# Altium PCB peregrine3.PcbDoc
Units mil, origin at the board's own origin, x right, y up, seen from the top; angles counter-clockwise.
Board outline 2200 x 2200 mil, 2 copper layers (1#Top, 16#Bottom); 70 components, 94 nets, 341 pads, 36 vias.
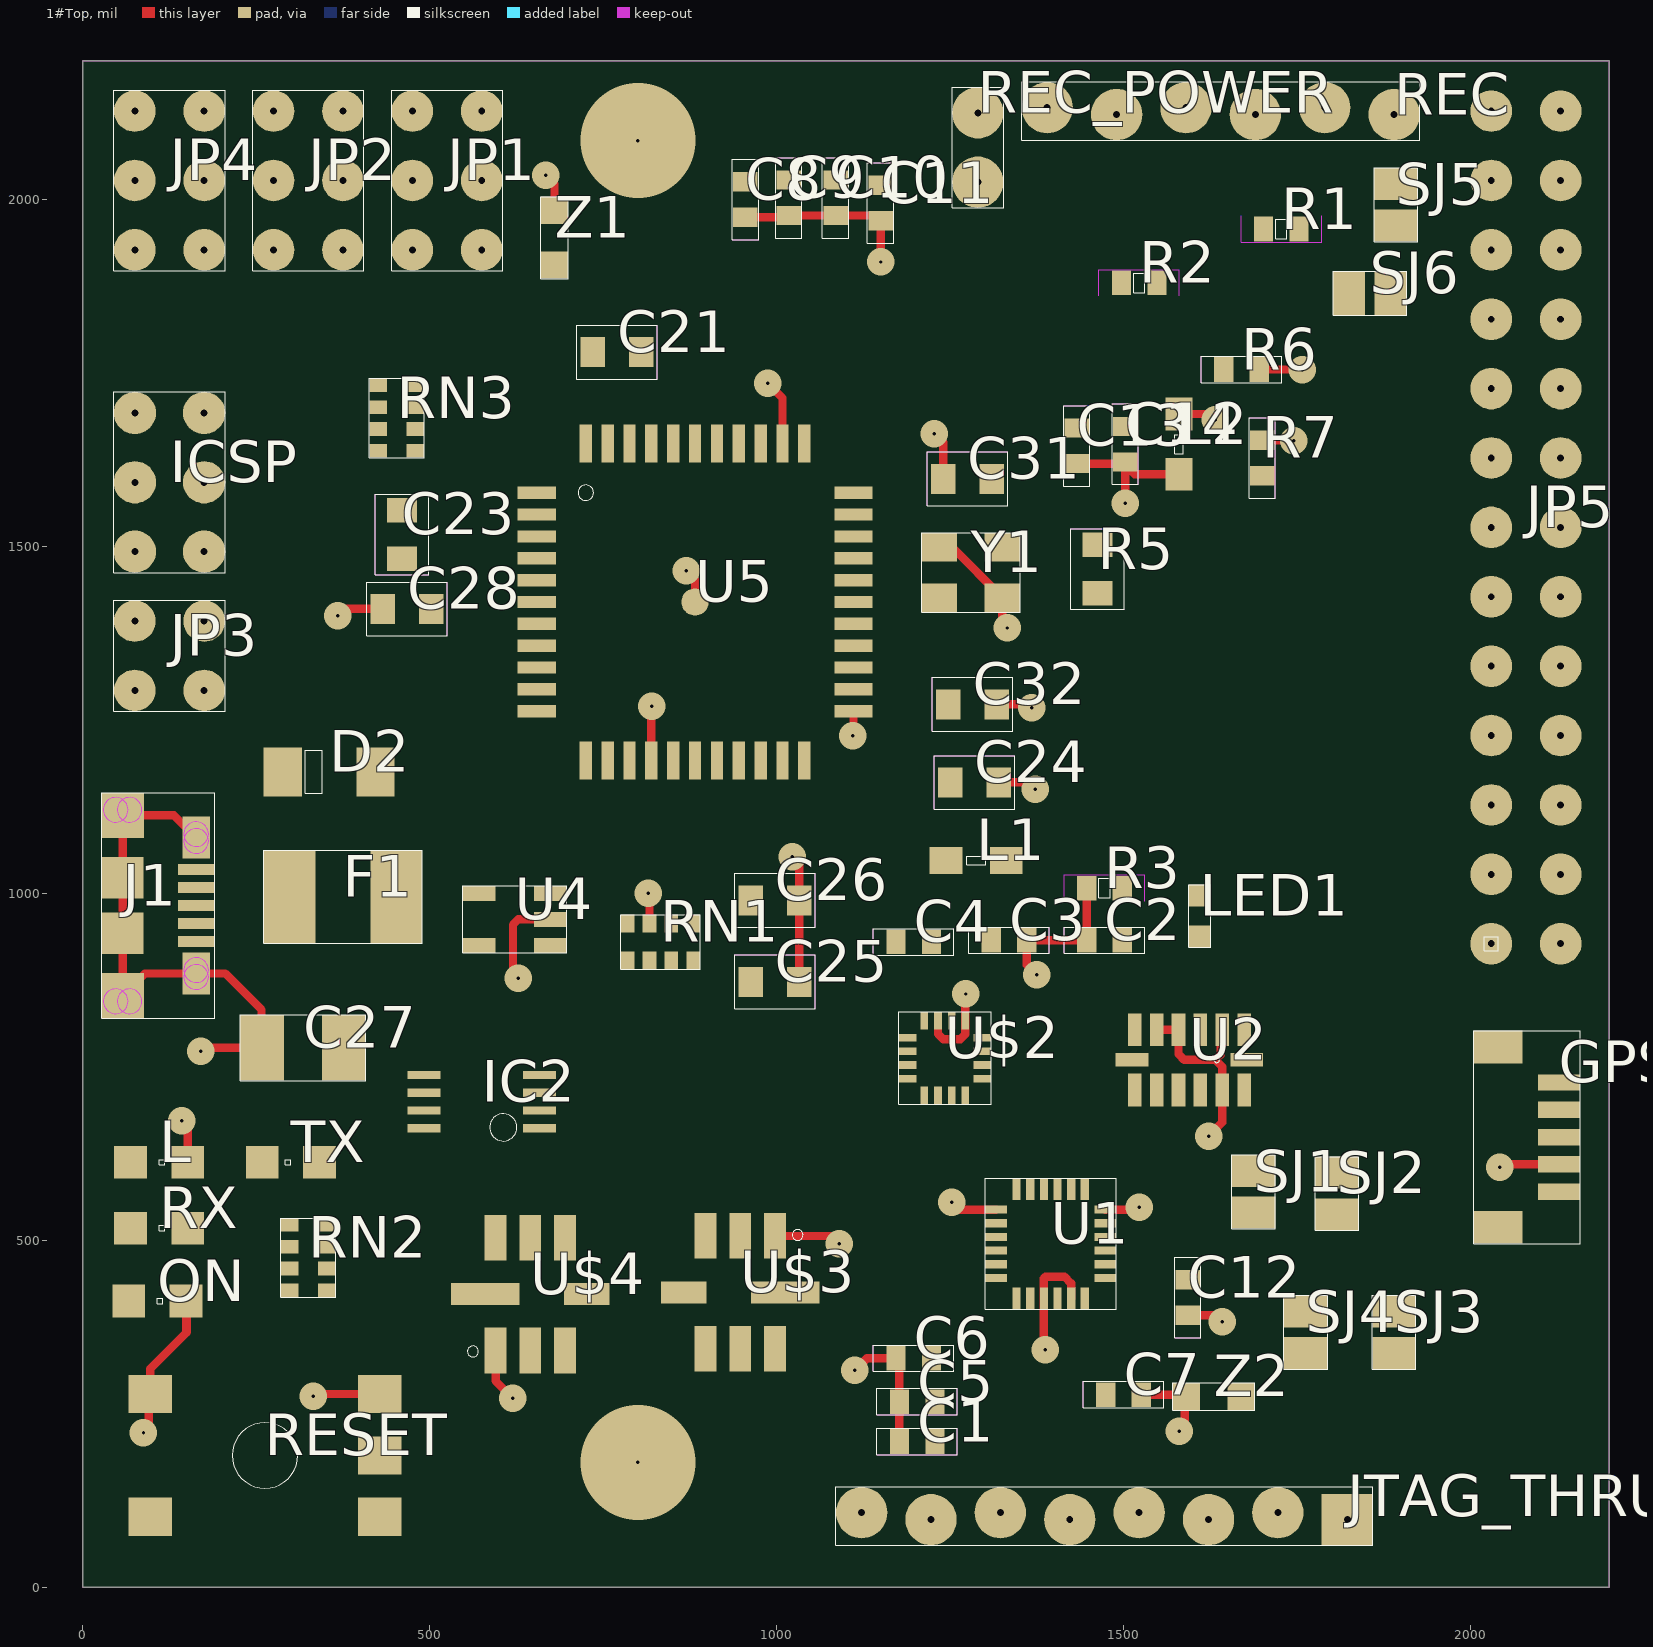
[diagram p0: 1#Top view]
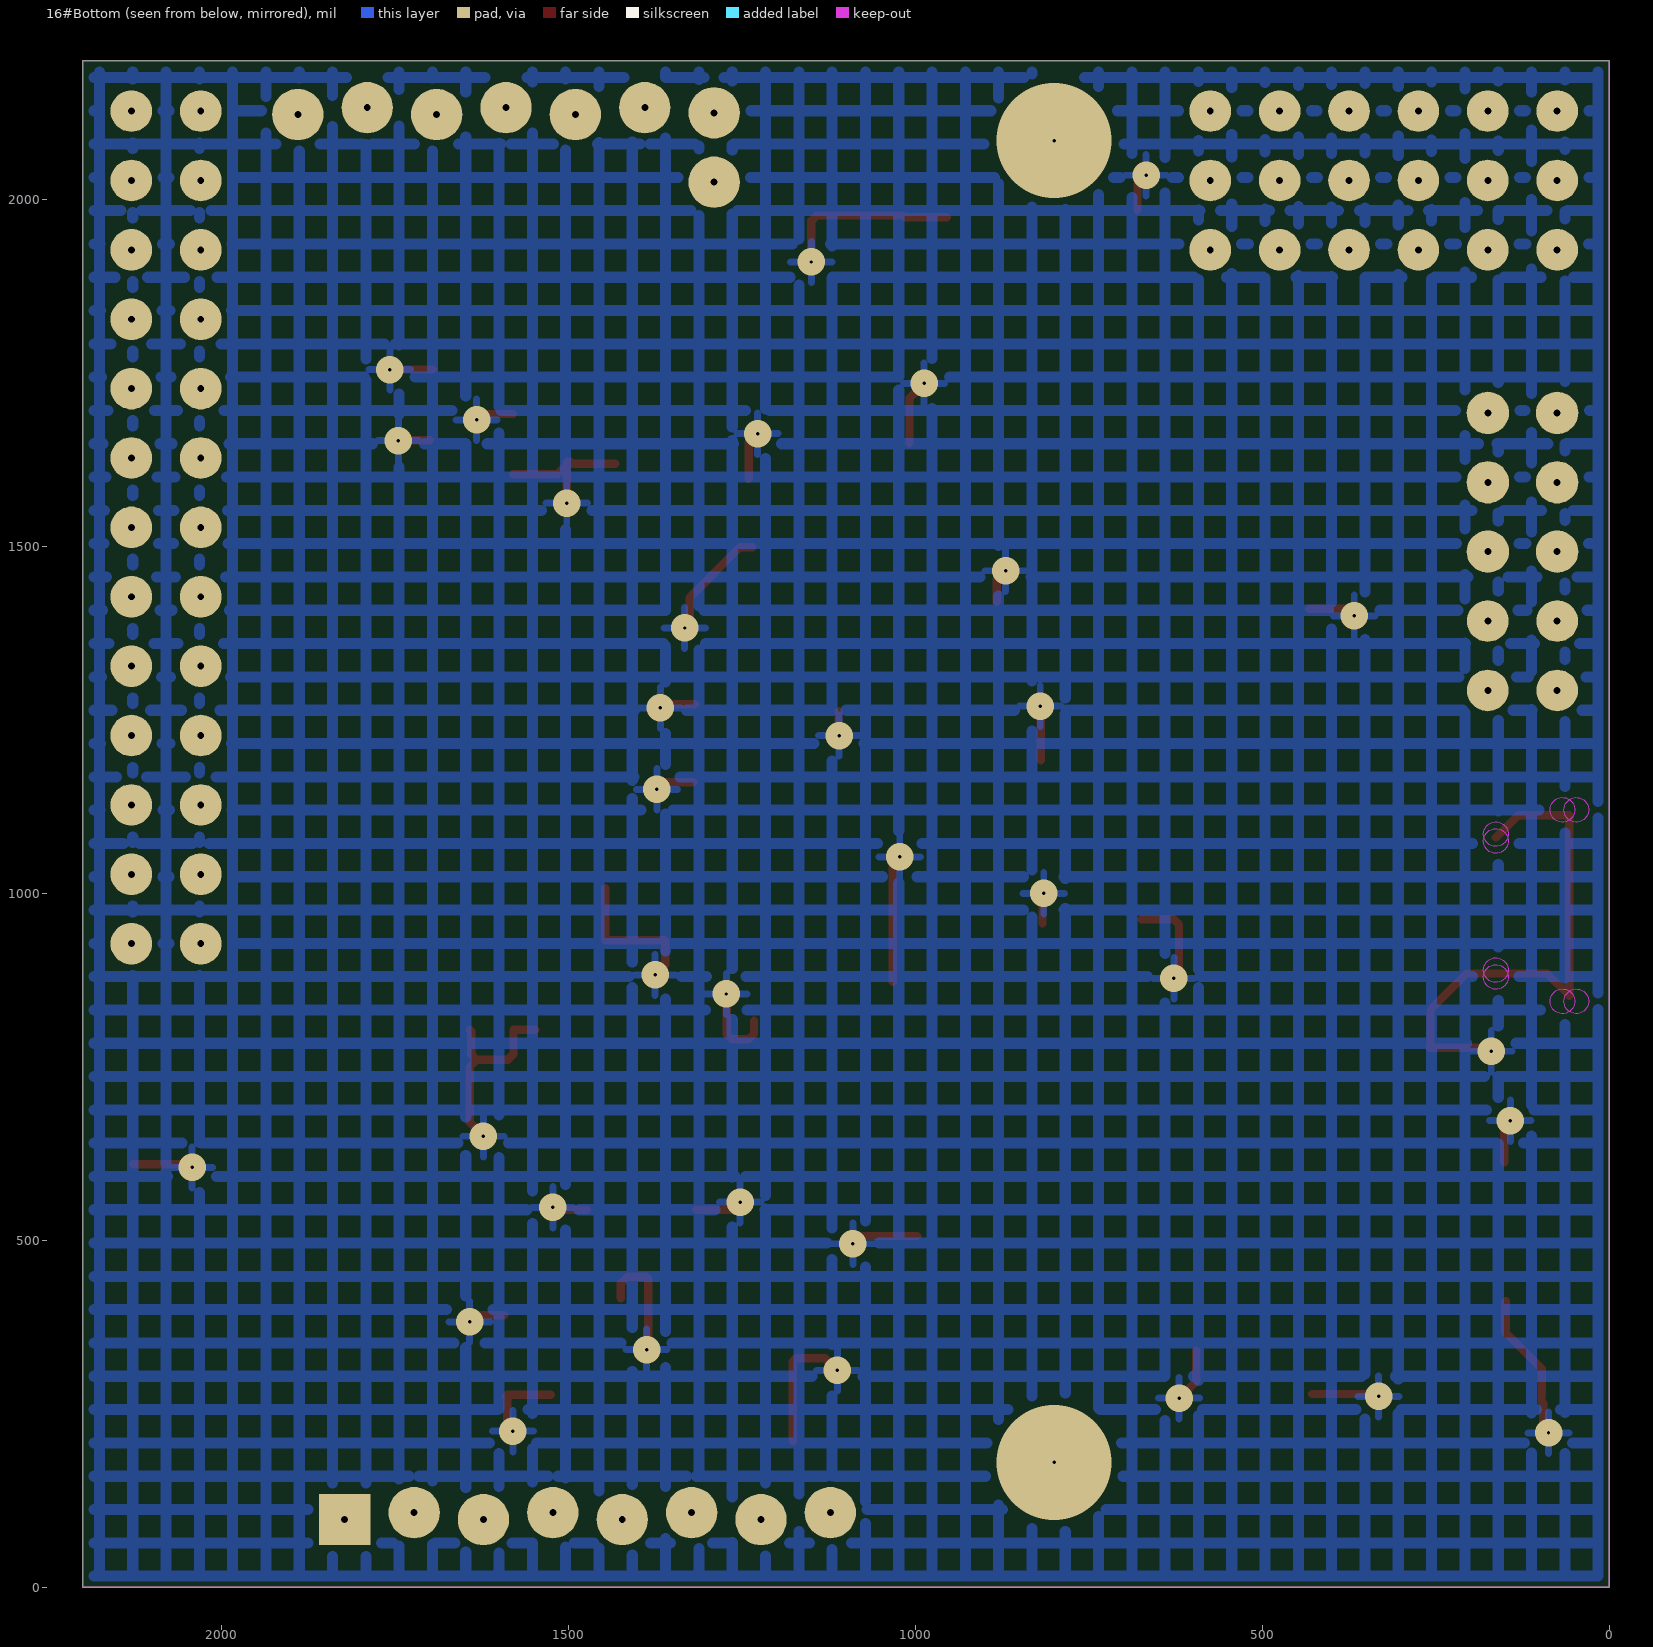
[diagram p1: 16#Bottom view, seen from below]

## Layer stack, top to bottom
1#Top: signal copper 1.4
Dielectric: dielectric 12.6, FR-4, Dk 4.8
16#Bottom: signal copper 1.4

## Board outline
0,0 2200,0 2200,2200 0,2200

## Design rules (kind name [scope] priority, off if disabled: settings)
Clearance "Clearance aref" [InNetClass('aref') vs InNetClass('aref')] p1: gap=10
Clearance "Clearance usbvcc" [InNetClass('usbvcc') vs InNetClass('usbvcc')] p2: gap=10
Clearance "Clearance gnd" [InNetClass('gnd') vs InNetClass('gnd')] p3: gap=10
Clearance "Clearance power" [InNetClass('power') vs InNetClass('power')] p4: gap=10
Clearance "Clearance default" [InNetClass('default') vs InNetClass('default')] p5: gap=10
Clearance "Clearance PCB" [All] p6: gap=8
PolygonConnect [All] p1: connectstyle=Relief reliefconductorwidth=10 reliefentries=4 polygonreliefangle="90 Angle" airgapwidth=10
RoutingLayers "Routing Layers From Layer Stack" [All] p1: top layer_v5=TRUE bottom layer_v5=TRUE
RoutingVias "PCB Via style Round6$0.125984" [All] p1: holewidth=82.99 width=165.98 viastyle="Through Hole" minholewidth=82.99 minwidth=165.98 maxholewidth=82.99 maxwidth=165.98
RoutingVias "PCB Via style Round5$0.023622" [All] p2: holewidth=19.81 width=39.62 viastyle="Through Hole" minholewidth=19.81 minwidth=39.62 maxholewidth=19.81 maxwidth=39.62
RoutingVias "PCB Via style Round1$0.024000" [All] p3: holewidth=20 width=40 viastyle="Through Hole" minholewidth=20 minwidth=40 maxholewidth=20 maxwidth=40
SilkscreenOverComponentPads [All] p1: minsilkscreentomaskgap=10
SolderMaskExpansion [All] p1: expansion=4
Width "Width aref" [InNetClass('aref')] p1: maxlimit=12 minlimit=8 preferedwidth=10
Width "Width usbvcc" [InNetClass('usbvcc')] p2: maxlimit=12 minlimit=8 preferedwidth=10
Width "Width gnd" [InNetClass('gnd')] p3: maxlimit=12 minlimit=8 preferedwidth=10
Width "Width power" [InNetClass('power')] p4: maxlimit=12 minlimit=8 preferedwidth=10
Width "Width default" [InNetClass('default')] p5: maxlimit=12 minlimit=8 preferedwidth=10
Width "Width PCB" [All] p6: maxlimit=12 minlimit=8 preferedwidth=10
26 further rules are at their usual default settings.

## Classes and differential pairs
net class usbvcc: XUSB
net class gnd: UGND
net class default: 3.3V 3V3 5-GND +5V A0 A1 A2 A3 A4 A5 AGND AREF AVCC D0/RX D1/TX D4 D5* D6* D7 D+ D- GND GPIO0(SDA) GPIO1(SCL) GPIO4(GPCLK0) GPIO9(MISO) GPIO10(MOSI) GPIO14(TXD) GPIO15(RXD) GPIO17 GPIO21(PCM_DOUT) GPIO22 GPRIO11(SCKL) GPS-RX GPS-TX HWB IO8 IO9* IO10* IO11* IO12 IO13* LL M_1 M_2 M_3 M_4 M_AUX1 M_AUX2 MISO MOSI N$1 N$2 N$3 N$4 N$5 N$6 N$7 N$8 N$9 N$10 N$11 N$12 N$13 N$14 N$15 N$16 PI_3V3_1 PI_3V3_2 PI_GND1 PI_GND2 RD+ RD- REC1 REC2 REC3 REC4 REC5 REC6 RESET RXLED SCK SCL SDA TXLED UCAP USBID V+ V- VUSB XTAL1 XTAL2

## Components (designator, comment, footprint, x,y, rotation, side; value= is the part's Value field where it differs from the comment)
C1 "Comment" 0402-CAP$SparkFun 1202.5,210 r180 top
C2 "Comment" 0402-CAP$SparkFun 1472.5,932.5 r180 top
C3 "Comment" 0402-CAP$SparkFun 1335,932.5 r0 top
C4 "Comment" 0402-CAP$SparkFun 1197.5,930 r180 top
C5 "Comment" 0402-CAP$SparkFun 1202.5,267.5 r180 top
C6 "Comment" 0402-CAP$SparkFun 1197.5,330 r180 top
C7 "Comment" 0402-CAP$SparkFun 1500,277.5 r0 top
C8 "Comment" 0402-CAP$SparkFun 955,2000 r270 top
C9 "Comment" 0402-CAP$SparkFun 1017.5,2002.5 r270 top
C10 "Comment" 0402-CAP$SparkFun 1085,2002.5 r270 top
C11 "Comment" 0402-CAP$SparkFun 1150,1995 r270 top
C12 "Comment" 0402-CAP$SparkFun 1592.5,417.5 r270 top
C13 "Comment" 0402-CAP$SparkFun 1432.5,1645 r270 top
C14 "Comment" 0402-CAP$SparkFun 1502.5,1647.5 r270 top
C21 "Comment" C0603-ROUND$SmartPrj 770,1780 r0 top
C23 "Comment" C0603-ROUND$SmartPrj 460,1517.5 r90 top
C24 "Comment" C0603-ROUND$SmartPrj 1285,1160 r0 top
C25 "Comment" C0603-ROUND$SmartPrj 997.5,872.5 r0 top
C26 "Comment" C0603-ROUND$SmartPrj 997.5,990 r0 top
C27 "Comment" SMC_B$rcl 317.5,777.5 r180 top
C28 "Comment" C0603-ROUND$SmartPrj 467.5,1410 r0 top
C31 "Comment" C0603-ROUND$SmartPrj 1275,1597.5 r0 top
C32 "Comment" C0603-ROUND$SmartPrj 1282.5,1272.5 r0 top
D2 "Comment" MINIMELF$diode 355,1175 r0 top
F1 "Comment" L1812$rcl 375,995 r180 top
GPS "Comment" EM408_CON$SparkFun 2127.5,727.5 r270 top
IC2 "Comment" MSOP08$linear 575,700 r90 top
ICSP "Comment" 2X03$SmartPrj 125,1592.5 r270 top
J1 "Comment" CON2_USB_MICRO_B_AT$SmartPrj 57.5,982.5 r270 top
JP1 "Comment" 2X03$pinhead 525,2027.5 r90 top
JP2 "Comment" 2X03$pinhead 325,2027.5 r90 top
JP3 "Comment" 2X02$pinhead 125,1342.5 r90 top
JP4 "Comment" 2X03$pinhead 125,2027.5 r90 top
JP5 "Comment" 2X13$pinhead 2080,1527.5 r270 top
JTAG_THRU "Comment" 1X08_LOCK$SparkFun 1822.5,102.5 r180 top
L "Comment" CHIPLED_0805$led 110,612.5 r270 top
L1 "Comment" 0805$wuerth-elektronik 1287.5,1047.5 r0 top
L2 "Comment" 0805$wuerth-elektronik 1580,1647.5 r90 top
LED1 "Comment" LED-0603$SparkFun 1610,967.5 r0 top
ON "Comment" CHIPLED_0805$led 107.5,412.5 r270 top
R1 "Comment" 0402-RES$SparkFun 1727.5,1957.5 r180 top
R2 "Comment" 0402-RES$SparkFun 1522.5,1880 r0 top
R3 "Comment" 0402-RES$SparkFun 1472.5,1007.5 r0 top
R5 "Comment" R0603-ROUND$SmartPrj 1462.5,1467.5 r90 top
R6 "Comment" R0402$SmartPrj 1670,1755 r0 top
R7 "Comment" R0402$SmartPrj 1700,1627.5 r270 top
REC "Comment" 1X06_LOCK$SparkFun 1890,2122.5 r180 top
REC_POWER "Comment" 1X02$SparkFun 1290,2125 r270 top
RESET "Comment" TS42$SmartPrj 262.5,190 r180 top
RN1 "Comment" CAY16$resistor-dil 832.5,930 r180 top
RN2 "Comment" CAY16$resistor-dil 325,475 r90 top
RN3 "Comment" CAY16$resistor-dil 452.5,1685 r90 top
RX "Comment" CHIPLED_0805$led 110,517.5 r270 top
SJ1 "Comment" SJ$jumper 1687.5,570 r270 top
SJ2 "Comment" SJ$jumper 1807.5,567.5 r270 top
SJ3 "Comment" SJ$jumper 1890,367.5 r90 top
SJ4 "Comment" SJ$jumper 1762.5,367.5 r90 top
SJ5 "Comment" SJ$jumper 1892.5,1992.5 r270 top
SJ6 "Comment" SJ$jumper 1855,1865 r180 top
TX "Comment" CHIPLED_0805$led 300,612.5 r90 top
U1 "Comment" QFN-24$SparkFun 1395,495 r0 top
U2 "Comment" LGA14$SparkFun 1595,760 r0 top
U4 "Comment" SOT23-5$SparkFun 622.5,962.5 r90 top
U5 "Comment" TQFP44-PAD$SmartPrj 882.5,1420 r0 top
U$2 "Comment" 16LPCC$SparkFun 1242.5,762.5 r90 top
U$3 "Comment" BMP085$SparkFun 947.5,425 r270 top
U$4 "Comment" BMP085$SparkFun 645,422.5 r90 top
Y1 "Comment" CRYSTAL-3.2-2.5$SmartPrj 1280,1462.5 r0 top
Z1 "Comment" CT/CN0603$varistor 680,1945 r90 top
Z2 "Comment" CT/CN0603$varistor 1630,275 r180 top

## Footprints (in the part's own frame and the unit in brackets; to place one, negate y for a bottom-side part, rotate by r counter-clockwise, add the part's x,y. Pads: shape width x height; smd on the part's side, far side on the other; paste and mask are expansions set on the pad)
1X02$SparkFun [mil]
  round 74 hole 10: 1(0,0) 2(100,0)
  silkscreen extent -37,-37 137,37
1X06_LOCK$SparkFun [mil]
  round 74 hole 10: 1(0,0) 2(100,-10) 3(200,0) 4(300,-10) 5(400,0) 6(500,-10)
  silkscreen extent -37,-47 537,37
1X08_LOCK$SparkFun [mil]
  rect 74x74 hole 10: 1(0,5)
  round 74 hole 10: 2(100,-5) 3(200,5) 4(300,-5) 5(400,5) 6(500,-5) 7(600,5) 8(700,-5)
  silkscreen extent -37,-42 737,42
2X02$pinhead [mil]
  round 60 / inner round 0 / far side round 60 hole 10: 1(-50,-50) 2(-50,50) 3(50,-50) 4(50,50)
  silkscreen extent -80,-80 80,80
2X03$pinhead [mil]
  round 60 / inner round 0 / far side round 60 hole 10: 1(-100,-50) 2(-100,50) 3(0,-50) 4(0,50) 5(100,-50) 6(100,50)
  silkscreen extent -130,-80 130,80
2X03$SmartPrj [mm]
  round 1.55 / inner round 0 / far side round 1.55 hole 0.254: 1(-2.54,-1.27) 2(-2.54,1.27) 3(0,-1.27) 4(0,1.27) 5(2.54,-1.27) 6(2.54,1.27)
  silkscreen extent -3.32,-2.05 3.32,2.05
2X13$pinhead [mil]
  round 60 / inner round 0 / far side round 60 hole 10: 1(-600,-50) 2(-600,50) 3(-500,-50) 4(-500,50) 5(-400,-50) 6(-400,50) 7(-300,-50) 8(-300,50) 9(-200,-50) 10(-200,50) 11(-100,-50) 12(-100,50) 13(0,-50) 14(0,50) 15(100,-50) 16(100,50) 17(200,-50) 18(200,50) 19(300,-50) 20(300,50) 21(400,-50) 22(400,50) 23(500,-50) 24(500,50) 25(600,-50) 26(600,50)
  silkscreen extent 590,-60 610,-40
16LPCC$SparkFun [mm]
  rect 0.65x0.28 smd: 1(-1.37,0.75) 2(-1.37,0.25) 3(-1.37,-0.25) 4(-1.37,-0.75) 9(1.37,-0.75) 10(1.37,-0.25) 11(1.37,0.25) 12(1.37,0.75)
  rect 0.28x0.65 smd: 5(-0.75,-1.37) 6(-0.25,-1.37) 7(0.25,-1.37) 8(0.75,-1.37) 13(0.75,1.37) 14(0.25,1.37) 15(-0.25,1.37) 16(-0.75,1.37)
  silkscreen extent -1.69,-1.69 1.69,1.69
0402-CAP$SparkFun [mm]
  rect 0.7x0.9 smd: 1(-0.65,0) 2(0.65,0)
  1#Top keep-out lines w0: 1.473,-0.483 1.473,0.483 -1.473,0.483 -1.473,-0.483
  silkscreen extent -1.47,-0.48 1.47,0.48
0402-RES$SparkFun [mm]
  rect 0.7x0.9 smd: 1(-0.65,0) 2(0.65,0)
  1#Top keep-out lines w0: 1.473,-0.483 1.473,0.483 -1.473,0.483 -1.473,-0.483
  silkscreen extent -0.2,-0.36 0.2,0.36
0805$wuerth-elektronik [mm]
  rect 1.2x1 smd: 1(-1.1,0) 2(1.1,0)
  silkscreen extent -0.35,-0.15 0.35,0.15
BMP085$SparkFun [mm]
  rect 1.67x0.8 smd: 1(-2.065,1.27) 2(-2.065,0) 3(-2.065,-1.27) 5(2.065,-1.27) 6(2.065,0) 7(2.065,1.27)
  rect 0.8x1.67 smd: 4(0,-2.065)
  rect 0.8x2.5 smd: 8(0,1.65)
  silkscreen extent -2.3,1.9 -1.9,2.3
C0603-ROUND$SmartPrj [mil]
  rect 35.37x43.31 smd: 1(-35,0) 2(35,0)
  1#Top keep-out lines w0: -57.99,-38.7 -57.99,38.7 57.99,38.7 57.99,-38.7
  silkscreen extent -58,-39 58,39
CAY16$resistor-dil [mm]
  rect 0.5x0.65 smd: 1(-1.2,-0.675) 2(-0.4,-0.675) 3(0.4,-0.675) 4(1.2,-0.675) 5(1.2,0.675) 6(0.4,0.675) 7(-0.4,0.675) 8(-1.2,0.675)
  silkscreen extent -1.45,-1 1.45,1
CHIPLED_0805$led [mm]
  rect 1.2x1.2 smd: A(0,-1.05) C(0,1.05)
  silkscreen extent -0.1,0 0.1,0.2
CON2_USB_MICRO_B_AT$SmartPrj [mil]
  rect 16x53 smd: P1(-52,106) P2(-26,106) P3(0,106) P4(26,106) P5(52,106)
  rect 65x61 smd: S1(-130,0) S2(130,0)
  rect 60x40 smd: S3(-98,106) S4(98,106)
  rect 60x60 smd: S5(-40,0) S6(40,0)
  Keep-Out Layer circle w0: c103,106 r17.78
  Keep-Out Layer circle w0: c93,106 r17.78
  Keep-Out Layer circle w0: c-93,106 r17.78
  Keep-Out Layer circle w0: c-103,106 r17.78
  Keep-Out Layer circle w0: c138,-10 r17.78
  Keep-Out Layer circle w0: c138,10 r17.78
  Keep-Out Layer circle w0: c-138,-10 r17.78
  Keep-Out Layer circle w0: c-138,10 r17.78
  silkscreen extent -163,-31 162,133
CRYSTAL-3.2-2.5$SmartPrj [mm]
  rect 1.3x1.05 smd: 1(-1.15,-0.925) 2(1.15,-0.925) 3(1.15,0.925) 4(-1.15,0.925)
  silkscreen extent -1.8,-1.45 1.8,1.45
CT/CN0603$varistor [mm]
  rect 1x1 smd: 1(-1,0) 2(1,0)
  silkscreen extent -1.5,-0.5 1.5,0.5
EM408_CON$SparkFun [mm]
  rect 0.6x1.55 smd: 1(4,0) 2(3,0) 3(2,0) 4(1,0) 5(0,0)
  rect 1.2x1.8 smd: P$1(-1.3,-2.225) P$2(5.3,-2.225)
  silkscreen extent -1.9,-3.12 5.9,0.78
L1812$rcl [mm]
  rect 1.9x3.4 smd: 1(-1.95,0) 2(1.95,0)
  silkscreen extent -2.9,-1.7 2.9,1.7
LED-0603$SparkFun [mm]
  rect 0.8x0.8 smd: A(0,-0.75) C(0,0.75)
  silkscreen extent -0.4,-1.15 0.4,1.15
LGA14$SparkFun [mm]
  rect 0.5x1.2 smd: 1(2,1.1) 2(1.2,1.1) 3(0.4,1.1) 4(-0.4,1.1) 5(-1.2,1.1) 6(-2,1.1) 8(-2,-1.1) 9(-1.2,-1.1) 10(-0.4,-1.1) 11(0.4,-1.1) 12(1.2,-1.1) 13(2,-1.1)
  rect 1.2x0.5 smd: 7(-2.1,0) 14(2.1,0)
  silkscreen extent 0.9,-0.1 1.1,0.1
MINIMELF$diode [mm]
  rect 1.4x1.8 smd: A(1.7,0) C(-1.7,0)
  silkscreen extent -0.86,-0.79 -0.25,0.79
MSOP08$linear [mm]
  rect 0.3x1.2 smd: 1(-0.976,-2.113) 2(-0.326,-2.113) 3(0.324,-2.113) 4(0.974,-2.113) 5(0.974,2.112) 6(0.324,2.112) 7(-0.326,2.112) 8(-0.976,2.112)
  silkscreen extent -1.45,-1.29 -0.45,-0.29
QFN-24$SparkFun [mm]
  rect 0.8x0.3 smd: 1(-2,1.25) 2(-2,0.75) 3(-2,0.25) 4(-2,-0.25) 5(-2,-0.75) 6(-2,-1.25) 13(2,-1.25) 14(2,-0.75) 15(2,-0.25) 16(2,0.25) 17(2,0.75) 18(2,1.25)
  rect 0.3x0.8 smd: 7(-1.25,-2) 8(-0.75,-2) 9(-0.25,-2) 10(0.25,-2) 11(0.75,-2) 12(1.25,-2) 19(1.25,2) 20(0.75,2) 21(0.25,2) 22(-0.25,2) 23(-0.75,2) 24(-1.25,2)
  silkscreen extent -2.4,-2.4 2.4,2.4
R0402$SmartPrj [mm]
  rect 0.7x0.9 smd: 1(-0.65,0) 2(0.65,0)
  1#Top keep-out lines w0: -1.473,-0.483 -1.473,0.483 1.473,0.483 1.473,-0.483
  silkscreen extent -1.47,-0.48 1.47,0.48
R0603-ROUND$SmartPrj [mil]
  rect 35.37x43.31 smd: 1(-35,0) 2(35,0)
  1#Top keep-out lines w0: -57.99,-38.7 -57.99,38.7 57.99,38.7 57.99,-38.7
  silkscreen extent -58,-39 58,39
SJ$jumper [mil]
  rect 46x63 smd: 1(-30,0) 2(30,0)
  silkscreen extent -53,-32 53,32
SMC_B$rcl [mm]
  rect 1.6x2.4 smd: +(-1.5,0) -(1.5,0)
  silkscreen extent -2.3,-1.2 2.3,1.2
SOT23-5$SparkFun [mm]
  rect 0.55x1.2 smd: 1(-0.95,-1.3) 2(0,-1.3) 3(0.95,-1.3) 4(0.95,1.3) 5(-0.95,1.3)
  silkscreen extent -1.23,-1.9 1.23,1.9
TQFP44-PAD$SmartPrj [mm]
  rect 1.4x0.45 smd: 1(-5.8,4) 2(-5.8,3.2) 3(-5.8,2.4) 4(-5.8,1.6) 5(-5.8,0.8) 6(-5.8,0) 7(-5.8,-0.8) 8(-5.8,-1.6) 9(-5.8,-2.4) 10(-5.8,-3.2) 11(-5.8,-4) 23(5.8,-4) 24(5.8,-3.2) 25(5.8,-2.4) 26(5.8,-1.6) 27(5.8,-0.8) 28(5.8,0) 29(5.8,0.8) 30(5.8,1.6) 31(5.8,2.4) 32(5.8,3.2) 33(5.8,4)
  rect 0.45x1.4 smd: 12(-4,-5.8) 13(-3.2,-5.8) 14(-2.4,-5.8) 15(-1.6,-5.8) 16(-0.8,-5.8) 17(0,-5.8) 18(0.8,-5.8) 19(1.6,-5.8) 20(2.4,-5.8) 21(3.2,-5.8) 22(4,-5.8) 34(4,5.8) 35(3.2,5.8) 36(2.4,5.8) 37(1.6,5.8) 38(0.8,5.8) 39(0,5.8) 40(-0.8,5.8) 41(-1.6,5.8) 42(-2.4,5.8) 43(-3.2,5.8) 44(-4,5.8)
  round 1 smd: P$1(0,0)
  silkscreen extent -4.28,3.72 -3.72,4.28
TS42$SmartPrj [mm]
  rect 1.6x1.4 smd: 1(-4.2,2.25) 2(4.2,2.25) 3(-4.2,-2.25) 4(4.2,-2.25) 5(-4.2,0)
  silkscreen extent -1.2,-1.2 1.2,1.2

## Via types
v1: diameter 39.62, hole 5, 1#Top to 16#Bottom, 34 vias
v2: diameter 165.98, hole 5, 1#Top to 16#Bottom, 2 vias

## Nets (pads, with @x,y where several pads share a name; then routed paths per layer and width w, separated by ;. In a path a pad name is that pad's centre, name@x,y a point inside that pad or via, vN(x,y) a via of type N, cw(c..) or ccw(c..) an arc to the next point about the centre after c; other vN are vias at no path point)
3.3V: 
3V3: 
5-GND: 
+5V: 
A0: 
A1: 
A2: 
A3: 
A4: 
A5: 
AGND: 
AREF: 
AVCC: 
D0/RX: 
D1/TX: 
D4: 
D5*: 
D6*: 
D7: 
D+: 
D-: 
GND:  | length 4583.6
  1#Top w12: v1(87.5,222.5) 95,230 95,265 97.5,267.5 97.5,315 ; 97.15,278.58 97.15,314.65 97.5,315 ; v1(142.5,672.5) 151.34,663.66 151.34,612.5 ; 163.5,1080.5 131.5,1112.5 57.5,1112.5 57.5,1022.5 57.5,942.5 57.5,852.5 89.5,884.5 163.5,884.5 205.5,884.5 257.5,832.5 257.5,778.45 258.45,777.5 175,777.5 v1(170,772.5) ; v1(332.5,275) 336.08,278.58 427.85,278.58 ; v1(367.5,1400) 377.5,1410 432.5,1410 ; 595,341.2 595,297.5 v1(620,272.5) ; v1(627.5,877.5) 620,895 620,955 627.5,962.5 673.68,962.5 ; v1(667.5,2035) 680,2022.5 680,1984.37 ; v1(815,1000) 816.75,998.25 816.75,956.57 ; 819.51,1191.65 819.51,1269.51 v1(820,1270) ; v1(870,1465) 882.5,1452.5 882.5,1420 ; 955,1974.41 1015,1974.41 1017.5,1976.91 1085,1976.91 1142.5,1976.91 1150,1969.41 v1(1150,1910) ; v1(987.5,1735) 1008.48,1714.02 1008.48,1648.35 ; 997.5,506.3 1078.7,506.3 v1(1090,495) ; v1(1022.5,1052.5) 1032.5,1042.5 1032.5,990 1032.5,872.5 ; v1(1110,1227.5) 1110.85,1228.35 1110.85,1262.52 ; v1(1112.5,312.5) 1130,330 1171.91,330 1176.91,325 1176.91,267.5 1176.91,210 ; v1(1227.5,1662.5) 1240,1650 1240,1597.5 ; 1232.66,816.44 1232.66,797.34 1240,790 1265,790 1272.03,797.03 1272.03,816.44 1272.03,854.53 v1(1272.5,855) ; 1234.72,1498.92 1252.44,1498.92 1325.28,1426.08 1325.28,1389.72 v1(1332.5,1382.5) ; v1(1252.5,555) 1263.29,544.21 1316.26,544.21 ; 1317.5,1272.5 1362.5,1272.5 v1(1367.5,1267.5) ; 1320,1160 1362.5,1160 v1(1372.5,1150) ; v1(1375,882.5) 1360.59,896.91 1360.59,932.5 1446.91,932.5 1446.91,1007.5 ; 1385.16,416.26 1385,416.42 ; v1(1387.5,342.5) 1385,345 1385,416.42 ; 1424.53,416.26 1424.53,437.97 1415,447.5 1387.5,447.5 1385,445 1385,416.42 ; 1432.5,1619.41 1500,1619.41 1502.5,1621.91 v1(1502.5,1562.5) ; 1473.74,544.21 1519.21,544.21 v1(1522.5,547.5) ; 1525.59,277.5 1588.13,277.5 ; 1547.76,803.31 1579.25,803.31 1579.25,768.25 1587.5,760 1632.5,760 ; v1(1580,225) 1588.13,233.13 1588.13,277.5 ; 1580,1690.81 1616.69,1690.81 v1(1632.5,1682.5) ; 1590.63,275 1588.13,277.5 ; 1592.5,391.91 1633.09,391.91 v1(1642.5,382.5) ; v1(1622.5,650) 1642.24,669.74 1642.24,716.69 1642.24,750.26 1632.5,760 ; 1642.24,803.31 1640,801.06 1640,767.5 1632.5,760 ; 1695.59,1755 v1(1757.5,1755) ; 1700,1653.09 1734.41,1653.09 v1(1745,1652.5) ; v1(2042.5,605) 2046.89,609.39 2127.5,609.39 ; 97.5,315 148.84,366.34 ; 148.84,366.34 148.84,412.5 150,411.34 150,367.5 148.84,366.34
  16#Bottom w12: v1@82.5,215 87.5,220 v1(87.5,222.5) ; v1@140,675 142.5,675 v1(142.5,672.5) ; v1@162.5,767.5 167.5,772.5 v1(170,772.5) ; v1@332.5,272.5 v1(332.5,275) ; v1@365,1397.5 v1(367.5,1400) ; v1(620,272.5) 622.5,272.5 v1@625,270 ; v1@627.5,870 v1(627.5,877.5) ; v1@665,2037.5 v1(667.5,2035) ; v1@812.5,1000 v1(815,1000) ; v1(820,1270) v1@820,1272.5 ; v1@867.5,1467.5 v1(870,1465) ; v1@985,1735 v1(987.5,1735) ; v1(1022.5,1052.5) v1@1022.5,1055 ; v1(1090,495) 1090,492.5 v1@1092.5,490 ; v1@1110,310 v1(1112.5,312.5) ; v1@1110,1225 v1(1110,1227.5) ; v1@1150,1907.5 v1(1150,1910) ; v1@1222.5,1672.5 1227.5,1667.5 v1(1227.5,1662.5) ; v1@1250,555 v1(1252.5,555) ; v1(1272.5,855) v1@1272.5,860 ; v1(1332.5,1382.5) 1335,1382.5 v1@1337.5,1380 ; v1(1367.5,1267.5) v1@1372.5,1267.5 ; v1@1370,1150 v1(1372.5,1150) ; v1(1375,882.5) v1@1377.5,882.5 ; v1@1387.5,337.5 v1(1387.5,342.5) ; v1(1502.5,1562.5) v1@1502.5,1570 ; v1(1522.5,547.5) v1@1522.5,550 ; v1@1577.5,222.5 v1(1580,225) ; v1@1620,650 v1(1622.5,650) ; v1@1627.5,1680 v1(1632.5,1682.5) ; v1(1642.5,382.5) v1@1647.5,377.5 ; v1@1742.5,1647.5 1740,1647.5 v1(1745,1652.5) ; v1@1747.5,1747.5 v1(1757.5,1755) ; v1@2040,602.5 v1(2042.5,605)
GPIO0(SDA): 
GPIO1(SCL): 
GPIO4(GPCLK0): 
GPIO9(MISO): 
GPIO10(MOSI): 
GPIO14(TXD): 
GPIO15(RXD): 
GPIO17: 
GPIO21(PCM_DOUT): 
GPIO22: 
GPRIO11(SCKL): 
GPS-RX: 
GPS-TX: 
HWB: 
IO8: 
IO9*: 
IO10*: 
IO11*: 
IO12: 
IO13*: 
LL: 
M_1: 
M_2: 
M_3: 
M_4: 
M_AUX1: 
M_AUX2: 
MISO: 
MOSI: 
N$1: 
N$2: 
N$3: 
N$4: 
N$5: 
N$6: 
  other v2: 800,180
N$7: 
N$8: 
N$9: 
N$10: 
N$11: 
N$12: 
N$13: 
N$14: 
  other v2: 800,2085
N$15: 
N$16: 
PI_3V3_1: 
PI_3V3_2: 
PI_GND1: 
PI_GND2: 
RD+: 
RD-: 
REC1: 
REC2: 
REC3: 
REC4: 
REC5: 
REC6: 
RESET: 
RXLED: 
SCK: 
SCL: 
SDA: 
TXLED: 
UCAP: 
UGND:  | length 90.1
  1#Top w12: 1497.5,1622.5 1515.81,1604.19 1580,1604.19
USBID: 
V+: 
V-: 
VUSB: 
XTAL1: 
XTAL2: 
XUSB: 
pads on no net: C1.1 C1.2 C2.1 C2.2 C3.1 C3.2 C4.1 C4.2 C5.1 C5.2 C6.1 C6.2 C7.1 C7.2 C8.1 C8.2 C9.1 C9.2 C10.1 C10.2 C11.1 C11.2 C12.1 C12.2 C13.1 C13.2 C14.1 C14.2 C21.1 C21.2 C23.1 C23.2 C24.1 C24.2 C25.1 C25.2 C26.1 C26.2 C27.+ C27.- C28.1 C28.2 C31.1 C31.2 C32.1 C32.2 D2.A D2.C F1.1 F1.2 GPS.1 GPS.2 GPS.3 GPS.4 GPS.5 GPS.P$1 GPS.P$2 IC2.1 IC2.2 IC2.3 IC2.4 IC2.5 IC2.6 IC2.7 IC2.8 ICSP.1 ICSP.2 ICSP.3 ICSP.4 ICSP.5 ICSP.6 J1.P1 J1.P2 J1.P3 J1.P4 J1.P5 J1.S1 J1.S2 J1.S3 J1.S4 J1.S5 J1.S6 JP1.1 JP1.2 JP1.3 JP1.4 JP1.5 JP1.6 JP2.1 JP2.2 JP2.3 JP2.4 JP2.5 JP2.6 JP3.1 JP3.2 JP3.3 JP3.4 JP4.1 JP4.2 JP4.3 JP4.4 JP4.5 JP4.6 JP5.1 JP5.2 JP5.3 JP5.4 JP5.5 JP5.6 JP5.7 JP5.8 JP5.9 JP5.10 JP5.11 JP5.12 JP5.13 JP5.14 JP5.15 JP5.16 JP5.17 JP5.18 JP5.19 JP5.20 JP5.21 JP5.22 JP5.23 JP5.24 JP5.25 JP5.26 JTAG_THRU.1 JTAG_THRU.2 JTAG_THRU.3 JTAG_THRU.4 JTAG_THRU.5 JTAG_THRU.6 JTAG_THRU.7 JTAG_THRU.8 L1.1 L1.2 L2.1 L2.2 L.A L.C LED1.A LED1.C ON.A ON.C R1.1 R1.2 R2.1 R2.2 R3.1 R3.2 R5.1 R5.2 R6.1 R6.2 R7.1 R7.2 REC.1 REC.2 REC.3 REC.4 REC.5 REC.6 REC_POWER.1 REC_POWER.2 RESET.1 RESET.2 RESET.3 RESET.4 RESET.5 RN1.1 RN1.2 RN1.3 RN1.4 RN1.5 RN1.6 RN1.7 RN1.8 RN2.1 RN2.2 RN2.3 RN2.4 RN2.5 RN2.6 RN2.7 RN2.8 RN3.1 RN3.2 RN3.3 RN3.4 RN3.5 RN3.6 RN3.7 RN3.8 RX.A RX.C SJ1.1 SJ1.2 SJ2.1 SJ2.2 SJ3.1 SJ3.2 SJ4.1 SJ4.2 SJ5.1 SJ5.2 SJ6.1 SJ6.2 TX.A TX.C U1.1 U1.2 U1.3 U1.4 U1.5 U1.6 U1.7 U1.8 U1.9 U1.10 U1.11 U1.12 U1.13 U1.14 U1.15 U1.16 U1.17 U1.18 U1.19 U1.20 U1.21 U1.22 U1.23 U1.24 U2.1 U2.2 U2.3 U2.4 U2.5 U2.6 U2.7 U2.8 U2.9 U2.10 U2.11 U2.12 U2.13 U2.14 U4.1 U4.2 U4.3 U4.4 U4.5 U5.1 U5.2 U5.3 U5.4 U5.5 U5.6 U5.7 U5.8 U5.9 U5.10 U5.11 U5.12 U5.13 U5.14 U5.15 U5.16 U5.17 U5.18 U5.19 U5.20 U5.21 U5.22 U5.23 U5.24 U5.25 U5.26 U5.27 U5.28 U5.29 U5.30 U5.31 U5.32 U5.33 U5.34 U5.35 U5.36 U5.37 U5.38 U5.39 U5.40 U5.41 U5.42 U5.43 U5.44 U5.P$1 U$2.1 U$2.2 U$2.3 U$2.4 U$2.5 U$2.6 U$2.7 U$2.8 U$2.9 U$2.10 U$2.11 U$2.12 U$2.13 U$2.14 U$2.15 U$2.16 U$3.1 U$3.2 U$3.3 U$3.4 U$3.5 U$3.6 U$3.7 U$3.8 U$4.1 U$4.2 U$4.3 U$4.4 U$4.5 U$4.6 U$4.7 U$4.8 Y1.1 Y1.2 Y1.3 Y1.4 Z1.1 Z1.2 Z2.1 Z2.2

## Polygon pours and split planes (outlines as drawn)
GND on 16#Bottom (hatched 90Degree grid 48 track 16, pour order 2): 0,2200 2200,2200 2200,0 0,0

## Keep-outs
Keep-Out Layer:
  lines w0: 0,0 0,2200 ; 0,0 0,2200 ; 0,0 0,2200 ; 0,0 2200,0 ; 0,2200 2200,2200 ; 0,2200 2200,2200 ; 0,2200 2200,2200 ; 2200,0 2200,2200 ; 2200,0 2200,2200 ; 2200,0 2200,2200